# Altium PCB main.PcbDoc
Units mm, origin at the board's own origin, x right, y up, seen from the top; angles counter-clockwise.
Board outline 75 x 30.4 mm, 4 copper layers (Top Layer, Int1, Int2, Bottom Layer), stack 1.334 mm thick; 60 components, 60 nets, 280 pads, 1537 vias.
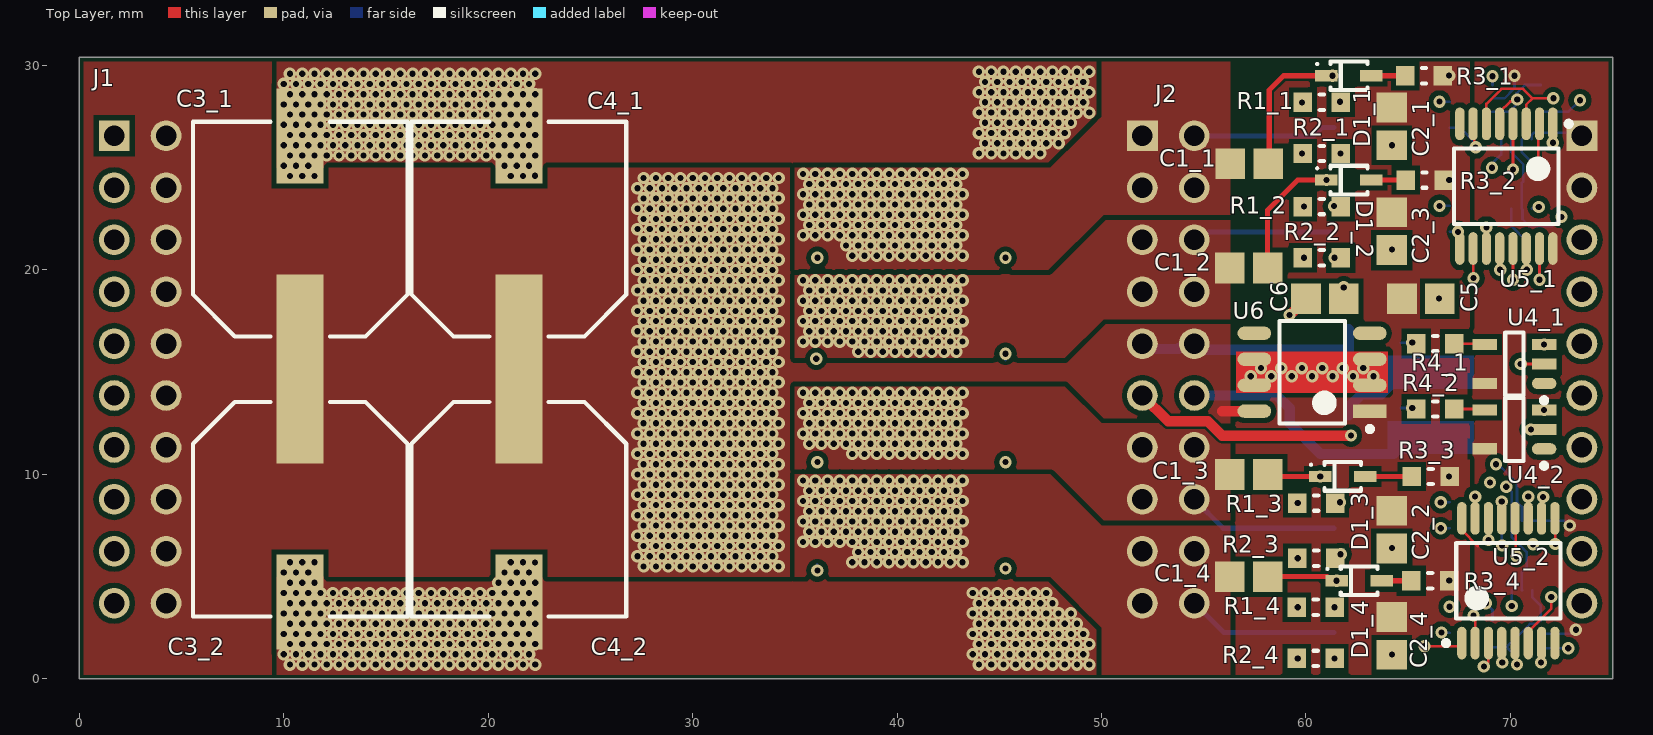
[diagram p0: Top Layer view]
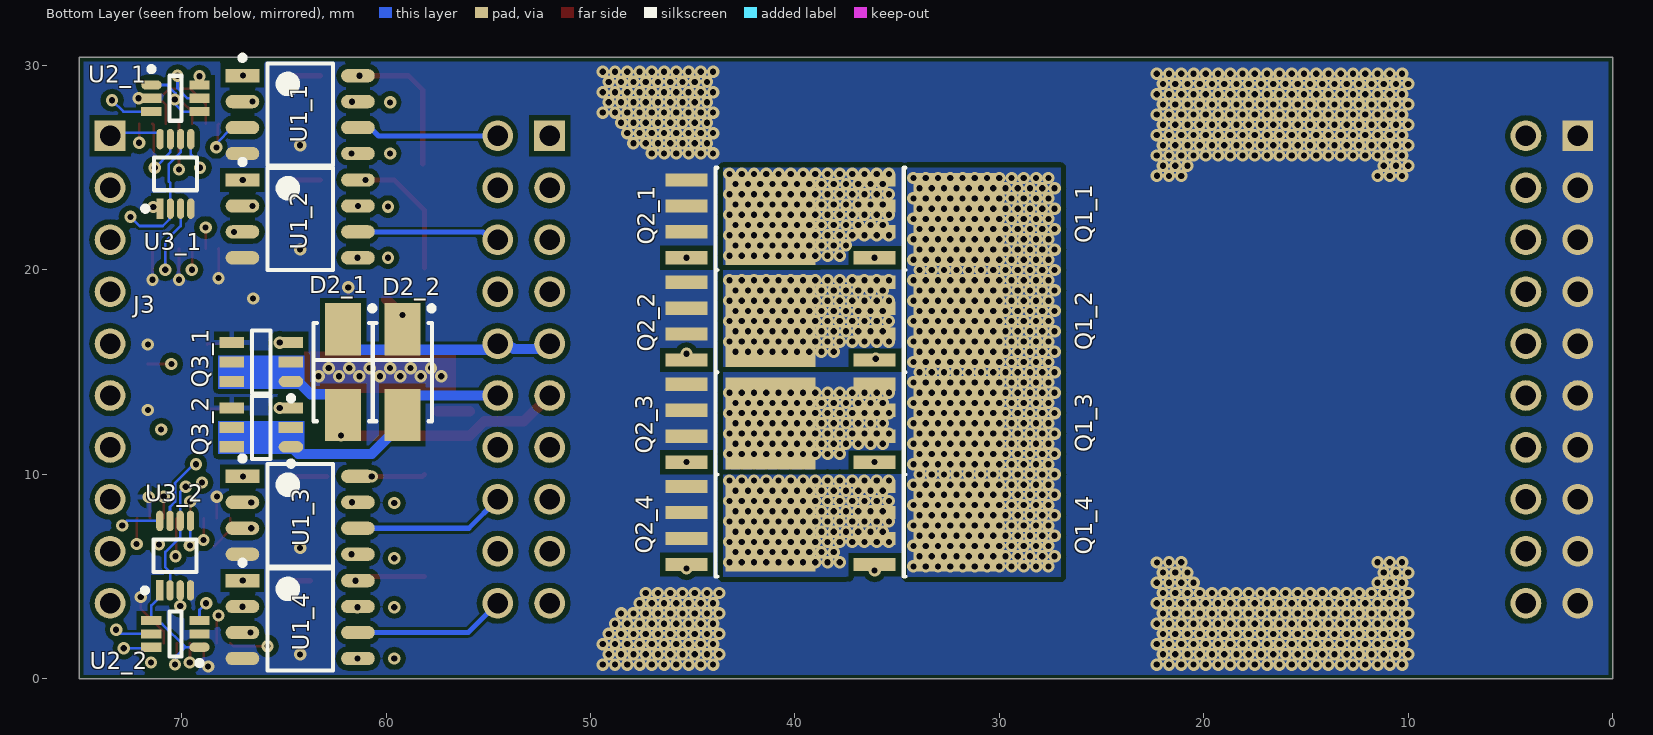
[diagram p1: Bottom Layer view, seen from below]
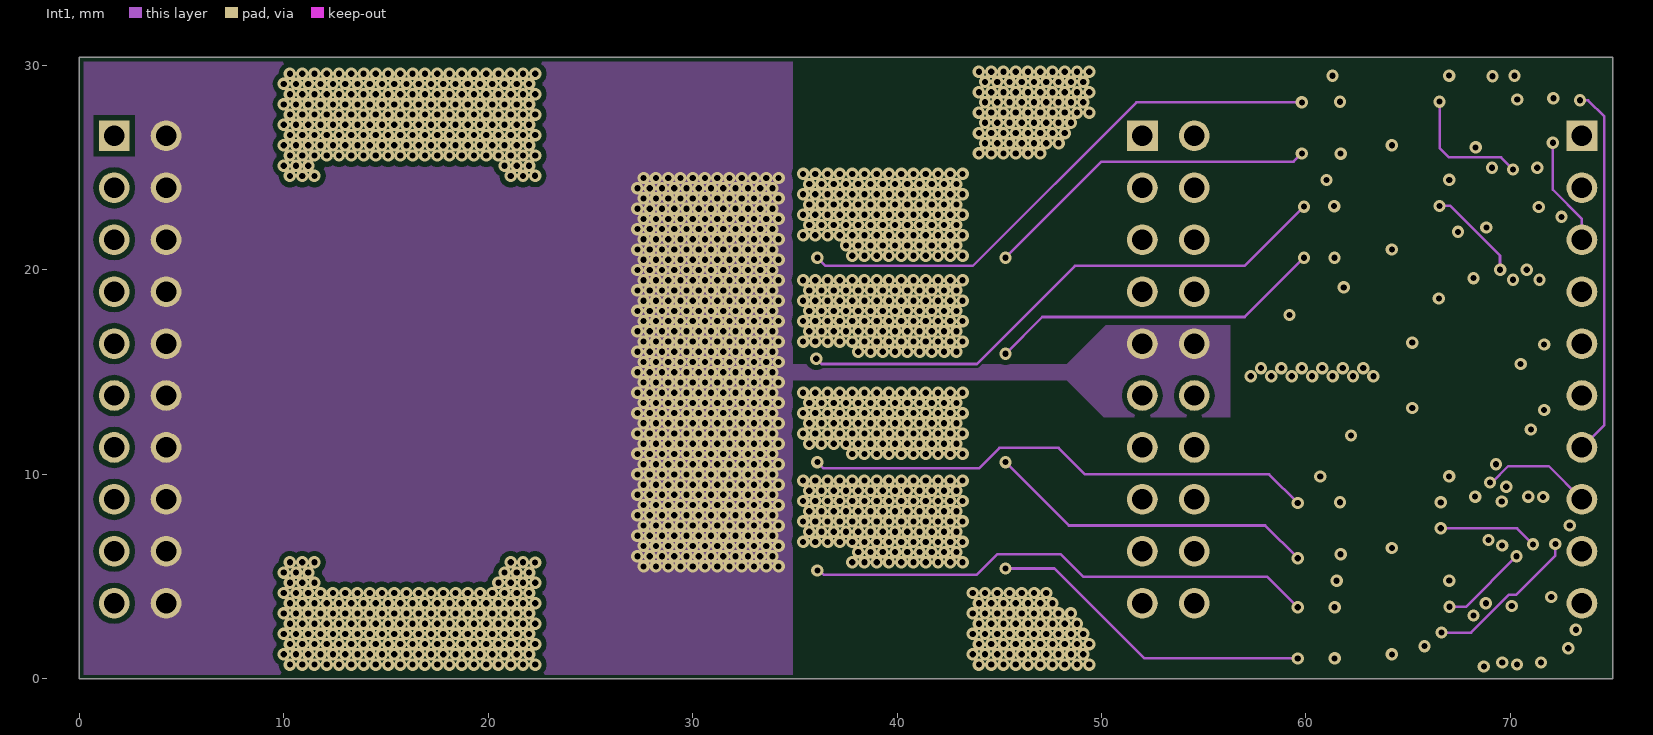
[diagram p2: Int1]
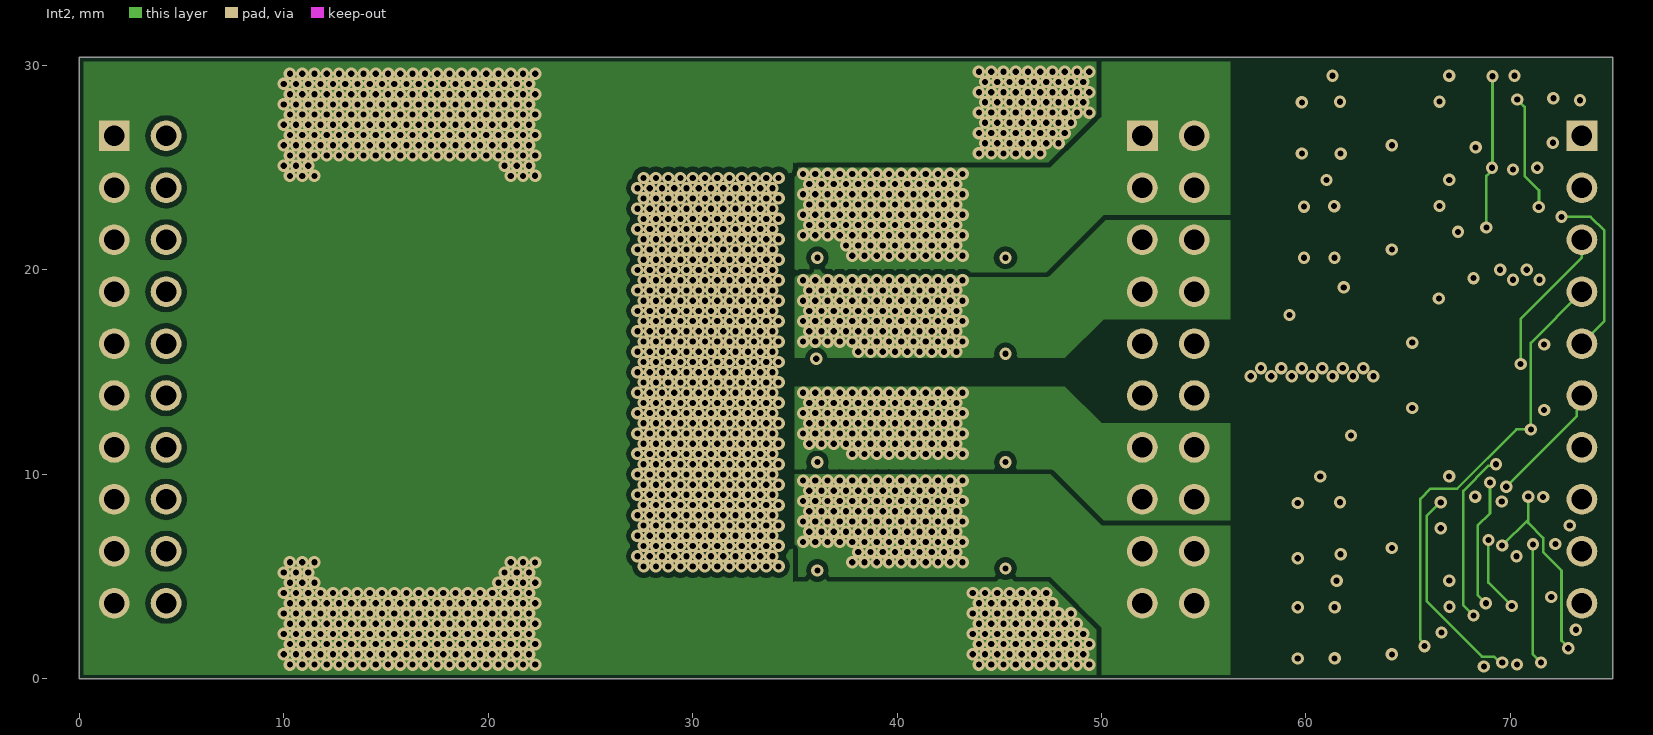
[diagram p3: Int2]
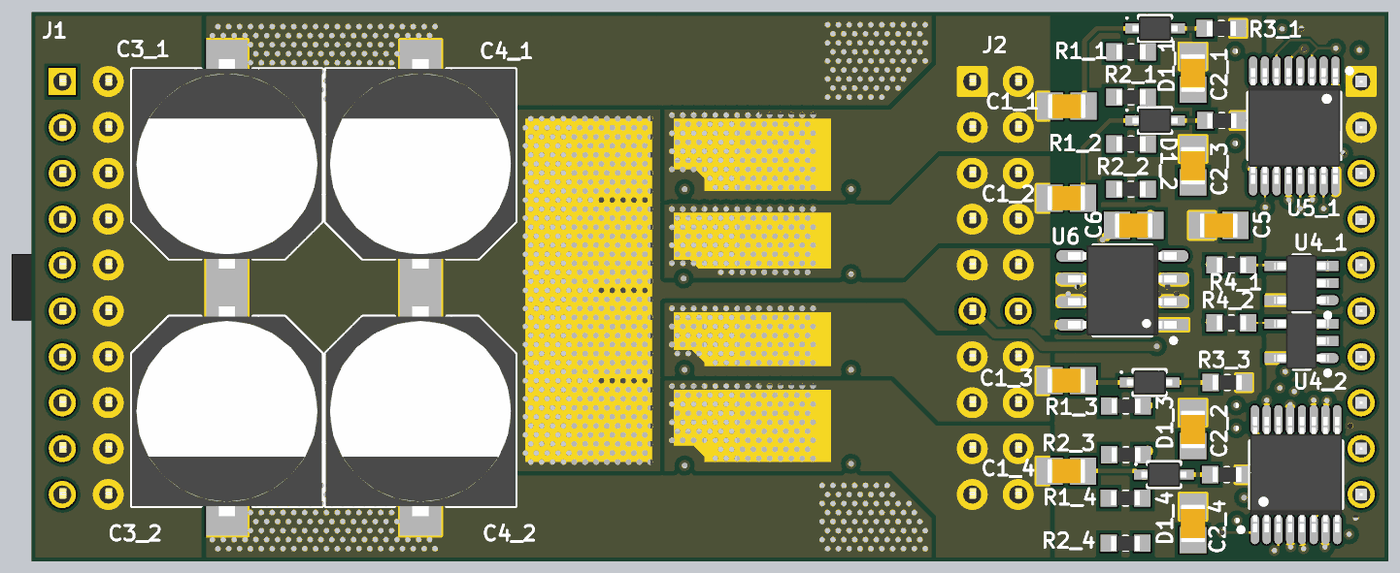
[diagram p4: 3D render of the assembled board from above, using the file's embedded part models]
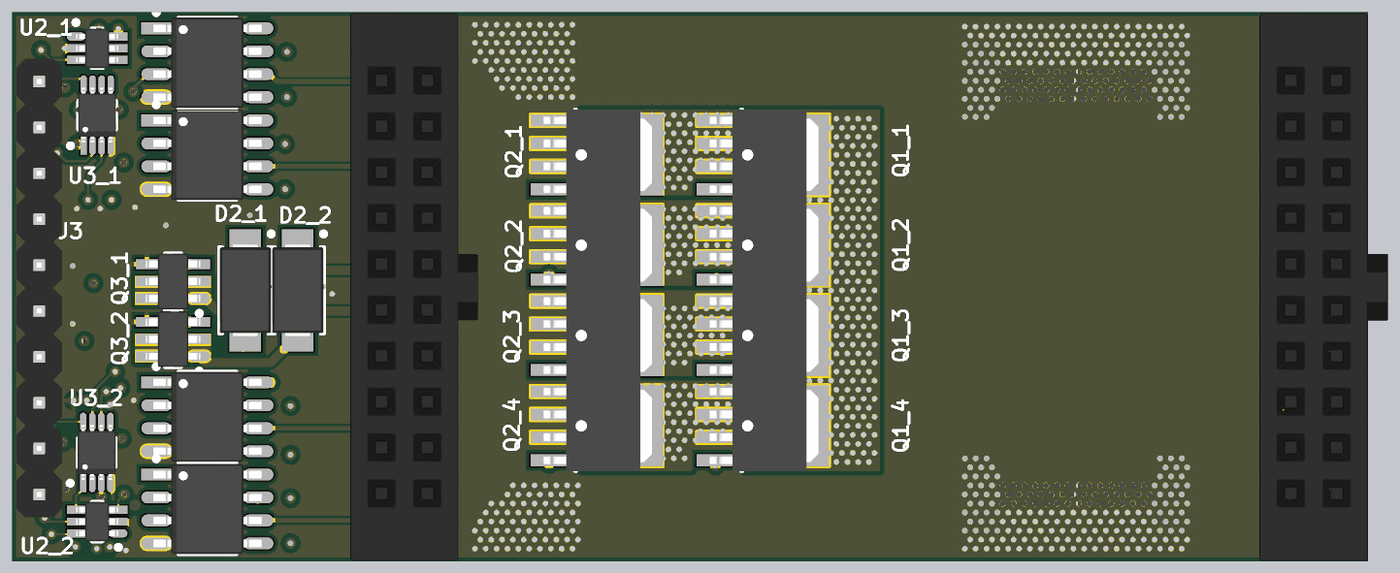
[diagram p5: 3D render of the assembled board from below, using the file's embedded part models]

## Layer stack, top to bottom
Top Solder: solder mask 0.0254, SM-001, Dk 4
Top Layer: signal copper 0.035
Dielectric 1: prepreg 0.1295, PP-017, Dk 4.3
Dielectric 2: prepreg 0.1295, PP-017, Dk 4.3
Int1: signal copper 0.0175
Dielectric 3: core 0.7112, Core-039, Dk 4.8
Int2: signal copper 0.0175
Dielectric 4: prepreg 0.1295, PP-017, Dk 4.3
Dielectric 5: prepreg 0.1295, PP-017, Dk 4.3
Bottom Layer: signal copper 0.035
Bottom Solder: solder mask 0.0254, SM-001, Dk 4

## Board outline
0,0 0,30.4 75,30.4 75,0

## Design rules (kind name [scope] priority, off if disabled: settings)
BoardOutlineClearance JLC_BoardOutlineClearance_Silk [OnLayer('Top Overlay')  or   OnLayer('Bottom Overlay')] p1: gap=0 ignorepadtopadclearanceinfootprint=FALSE
BoardOutlineClearance JLC_BoardOutlineClearance_Single [All] p2: gap=0.4 ignorepadtopadclearanceinfootprint=FALSE except(0: Arc-SplitContinuation Track-SplitContinuation SMDPad-SplitContinuation THPad-SplitContinuation Via-SplitContinuation Fill-SplitContinuation Poly-SplitContinuation Region-SplitContinuation Text-SplitContinuation; 0.2: Arc-OutlineEdge Track-OutlineEdge SMDPad-OutlineEdge THPad-OutlineEdge Via-OutlineEdge Fill-OutlineEdge Poly-OutlineEdge Region-OutlineEdge Text-OutlineEdge)
BoardOutlineClearance JLC_BoardOutlineClearance_Panel [All] p3: gap=0.4 ignorepadtopadclearanceinfootprint=FALSE except(0: Arc-SplitContinuation Track-SplitContinuation SMDPad-SplitContinuation THPad-SplitContinuation Via-SplitContinuation Fill-SplitContinuation Poly-SplitContinuation Region-SplitContinuation Text-SplitContinuation)
Clearance JLC_Clearance_SB [(HasFootprint('0603 Solder Bridge-Footprint-1'))] p1: gap=0.127 ignorepadtopadclearanceinfootprint=FALSE except(0: Fill-Hole Poly-Hole Region-Hole Text-Hole; 0.254: SMDPad-Fill SMDPad-Poly SMDPad-Region THPad-Fill THPad-Poly THPad-Region Via-Fill Via-Poly Via-Region)
Clearance JLC_Clearance_Top [All] p2: gap=0.127 ignorepadtopadclearanceinfootprint=FALSE except(0: Fill-Hole Poly-Hole Region-Hole Text-Hole; 0.254: SMDPad-Fill SMDPad-Poly SMDPad-Region THPad-Fill THPad-Poly THPad-Region Via-Fill Via-Poly Via-Region Fill-Fill Fill-Poly Fill-Region Poly-Poly Poly-Region Region-Region)
Clearance JLC_Clearance_SameNet [All] p3: gap=0 ignorepadtopadclearanceinfootprint=TRUE
ComponentClearance JLC_ComponentClearance [All] p1: gap=0 collisioncheckmode=3 verticalgap=0 showdistances=FALSE
ComponentOrientations JLC_ComponentOrientations [All] p1: allowedrotations=32
Height JLC_Height [All] p1: minheight=0 maxheight=2539.975 prefheight=12.7
HoleSize JLC_HoleSize [All] p1: absolutevalues=TRUE maxlimit=6.3 minlimit=0.3 maxpercent=80.000 minpercent=20.000
HoleToHoleClearance JLC_HoleToHoleClearance [All] p1: gap=0.54 allowstackedmicrovias=TRUE
MinimumAnnularRing JLC_MinimumAnnularRing [All] p1: minimumring=0.076
MinimumSolderMaskSliver JLC_MinimumSolderMaskSliver [All] p1: minsoldermaskwidth=0
PolygonConnect [All] p1: connectstyle=Relief reliefconductorwidth=0.254 reliefentries=4 polygonreliefangle="90 Angle" airgapwidth=0.254
RoutingVias JLC_RoutingVias [All] p1: holewidth=0.381 width=0.635 viastyle="Through Hole" minholewidth=0.305 minwidth=0.61 maxholewidth=6.299 maxwidth=12.7 useviatemplates=TRUE viatemplateguid#1={57812D51-82ED-402C-9FC4-13BC4F7481FD} viatemplatename#1=JLC_2lyr_min
SilkToSilkClearance JLC_SilkToSilkClearance [All] p1: silktosilkclearance=0
SilkToSolderMaskClearance JLC_SilkToSolderMaskClearance [IsPad] p1: minsilkscreentomaskgap=0 clearancetoexposedcopper=TRUE
SolderMaskExpansion [All] p1: expansion=0.102 istentingtop=FALSE
Width JLC_Width [All] p1: maxlimit=12.7 minlimit=0.127 preferedwidth=0.254
23 further rules are at their usual default settings.

## Classes and differential pairs
channel class motor: mot_L mot_R
channel class halfBridge: mot_L1_hb11 mot_L1_hb22 mot_R2_hb13 mot_R2_hb24
component class mot_R: C3_2 C4_2 D2_2 Q3_2 R4_2 U2_2 U3_2 U4_2 U5_2
component class mot_R2_hb24: C1_4 C2_4 D1_4 Q1_4 Q2_4 R1_4 R2_4 R3_4 U1_4
component class mot_R2_hb13: C1_3 C2_3 D1_3 Q1_3 Q2_3 R1_3 R2_3 R3_3 U1_3
component class mot_L: C3_1 C4_1 D2_1 Q3_1 R4_1 U2_1 U3_1 U4_1 U5_1
component class mot_L1_hb22: C1_2 C2_2 D1_2 Q1_2 Q2_2 R1_2 R2_2 R3_2 U1_2
component class mot_L1_hb11: C1_1 C2_1 D1_1 Q1_1 Q2_1 R1_1 R2_1 R3_1 U1_1
component class main: C5 C6 J1 J2 J3 U6

## Components (designator, comment, footprint, x,y, rotation, side; value= is the part's Value field where it differs from the comment)
C1_1 "35n4 25V" "CAP 0805 L" 57.225,25.2 r0 top (schematic designator C1)
C1_2 "35n4 25V" "CAP 0805 L" 57.2,20.1 r0 top (schematic designator C1)
C1_3 "35n4 25V" "CAP 0805 L" 57.2,10 r0 top (schematic designator C1)
C1_4 "35n4 25V" "CAP 0805 L" 57.2,5 r0 top (schematic designator C1)
C2_1 "1u 15V" "CAP 0805 L" 64.2,27.025 r90 top (schematic designator C2)
C2_2 "1u 15V" "CAP 0805 L" 64.2,7.3 r90 top (schematic designator C2)
C2_3 "1u 15V" "CAP 0805 L" 64.2,21.9 r90 top (schematic designator C2)
C2_4 "1u 15V" "CAP 0805 L" 64.2,2.1 r90 top (schematic designator C2)
C3_1 "330u 35V" "CAP ALUM 10X10" 10.8,22 r90 top (schematic designator C3)
C3_2 "330u 35V" "CAP ALUM 10X10" 10.8,8.3 r270 top (schematic designator C3)
C4_1 "330u 35V" "CAP ALUM 10X10" 21.5,22 r90 top (schematic designator C4)
C4_2 "330u 35V" "CAP ALUM 10X10" 21.5,8.3 r270 top (schematic designator C4)
C5 "10u" "CAP 0805 L" 65.625,18.6 r180 top
C6 "10u" "CAP 0805 L" 60.925,18.6 r180 top
D1_1 "100V 200mA" SODFL250X100-2M 62.1,29.5 r0 top (schematic designator D1)
D1_2 "100V 200mA" SODFL250X100-2M 62.1,24.4 r0 top (schematic designator D1)
D1_3 "100V 200mA" SODFL250X100-2M 61.8,9.9 r0 top (schematic designator D1)
D1_4 "100V 200mA" SODFL250X100-2M 62.6,4.8 r0 top (schematic designator D1)
D2_1 "1000V 1A" DIOM4426X30M 62.1,15 r270 bottom (schematic designator D2)
D2_2 "1000V 1A" DIOM4426X30M 59.2,15 r270 bottom (schematic designator D2)
J1 "2x10 F" "CONN HDR 2x10 F BOT" 1.7,26.56 r0 top
J2 "2x10 F" "CONN HDR 2x10 F BOT" 52,26.56 r0 top
J3 "1x10 M" "CONN HDR 1x10 M" 73.5,26.56 r180 bottom
Q1_1 "40V 100A 4m4R" "DPAK127P600X120-5M (LFPAK56; Power-SO8)" 33.45,22.5 r180 bottom (schematic designator Q1)
Q1_2 "40V 100A 4m4R" "DPAK127P600X120-5M (LFPAK56; Power-SO8)" 33.45,17.5 r180 bottom (schematic designator Q1)
Q1_3 "40V 100A 4m4R" "DPAK127P600X120-5M (LFPAK56; Power-SO8)" 33.45,12.5 r180 bottom (schematic designator Q1)
Q1_4 "40V 100A 4m4R" "DPAK127P600X120-5M (LFPAK56; Power-SO8)" 33.45,7.5 r180 bottom (schematic designator Q1)
Q2_1 "40V 100A 4m4R" "DPAK127P600X120-5M (LFPAK56; Power-SO8)" 42.65,22.5 r180 bottom (schematic designator Q2)
Q2_2 "40V 100A 4m4R" "DPAK127P600X120-5M (LFPAK56; Power-SO8)" 42.65,17.5 r180 bottom (schematic designator Q2)
Q2_3 "40V 100A 4m4R" "DPAK127P600X120-5M (LFPAK56; Power-SO8)" 42.65,12.5 r180 bottom (schematic designator Q2)
Q2_4 "40V 100A 4m4R" "DPAK127P600X120-5M (LFPAK56; Power-SO8)" 42.65,7.5 r180 bottom (schematic designator Q2)
Q3_1 "40V 6A2 23m" SOT457_FET 66.1,15.5 r0 bottom (schematic designator Q3)
Q3_2 "40V 6A2 23m" SOT457_FET 66.1,12.3 r0 bottom (schematic designator Q3)
R1_1 "3R96" "RES 0603 L" 60.775,28.2 r180 top (schematic designator R1)
R1_2 "3R96" "RES 0603 L" 60.775,23.1 r180 top (schematic designator R1)
R1_3 "3R96" "RES 0603 L" 60.5,8.6 r180 top (schematic designator R1)
R1_4 "3R96" "RES 0603 L" 60.475,3.5 r180 top (schematic designator R1)
R2_1 "3R96" "RES 0603 L" 60.775,25.7 r180 top (schematic designator R2)
R2_2 "3R96" "RES 0603 L" 60.775,20.6 r180 top (schematic designator R2)
R2_3 "3R96" "RES 0603 L" 60.5,5.9 r180 top (schematic designator R2)
R2_4 "3R96" "RES 0603 L" 60.475,1 r180 top (schematic designator R2)
R3_1 "1R" "RES 0603 L" 65.775,29.5 r180 top (schematic designator R3)
R3_2 "1R" "RES 0603 L" 65.8,24.4 r180 top (schematic designator R3)
R3_3 "1R" "RES 0603 L" 66.1,9.9 r180 top (schematic designator R3)
R3_4 "1R" "RES 0603 L" 66.075,4.8 r180 top (schematic designator R3)
R4_1 "100" "RES 0603 L" 66.325,16.4 r180 top (schematic designator R4)
R4_2 "100" "RES 0603 L" 66.325,13.2 r180 top (schematic designator R4)
U1_1 "IRS2007STRPBF" SOIC-8 64.2,27.6 r180 bottom (schematic designator U1)
U1_2 "IRS2007STRPBF" SOIC-8 64.2,22.5 r180 bottom (schematic designator U1)
U1_3 "IRS2007STRPBF" SOIC-8 64.2,8 r180 bottom (schematic designator U1)
U1_4 "IRS2007STRPBF" SOIC-8 64.2,2.9 r180 bottom (schematic designator U1)
U2_1 "74LVC2G14GW,125" SOT363 70.3,28.4 r180 bottom (schematic designator U2)
U2_2 "74LVC2G14GW,125" SOT363 70.3,2.2 r0 bottom (schematic designator U2)
U3_1 "SN74LVC2G08DCUR" VSSOP-8 70.3,24.7 r90 bottom (schematic designator U3)
U3_2 "SN74LVC2G08DCUR" VSSOP-8 70.318,6.026 r90 bottom (schematic designator U3)
U4_1 "74LVC1G17GW,125" SOT753 70.2,15.4 r180 top (schematic designator U4)
U4_2 "74LVC1G17GW,125" SOT753 70.2,12.2 r180 top (schematic designator U4)
U5_1 "74LVC2G14GW,125" TSSOP-16 69.8,24.1 r270 top (schematic designator U5)
U5_2 "74LVC2G14GW,125" TSSOP-16 69.9,4.8 r90 top (schematic designator U5)
U6 "REG 12V" SOIC-8 60.3,15 r180 top

## Footprints (in the part's own frame and the unit in brackets; to place one, negate y for a bottom-side part, rotate by r counter-clockwise, add the part's x,y. Pads: shape width x height; smd on the part's side, far side on the other; paste and mask are expansions set on the pad)
"CAP 0805 L" [mm] "Chip Capacitor, 2-Leads, Body 2.00x1.25mm, IPC Low Density"
  rect 1.45x1.5 smd: 1(-0.925,0) 2(0.925,0)
  body extent -1.05,-0.67 1.05,0.67, height 1.35
"CAP ALUM 10X10" [mm] "Aluminum Electrolytic Capacitor, Body 10.30x10.30x10.50mm, IPC Low Density"
  rect 4.65x2.3 smd: 1(-4.55,0) 2(4.55,0)
  silkscreen extent -5.25,-5.25 5.25,5.25, body extent -5.8,-5.25 5.8,5.25, height 10.5
"CONN HDR 1x10 M" [mm]
  rect 1.5x1.5 hole 1: 1(0,0)
  round 1.5 hole 1: 2(0,-2.54) 3(0,-5.08) 4(0,-7.62) 5(0,-10.16) 6(0,-12.7) 7(0,-15.24) 8(0,-17.78) 9(0,-20.32) 10(0,-22.86)
  body extent -1.27,-24.13 1.27,1.27, height 8.39
"CONN HDR 2x10 F BOT" [mm]
  rect 1.5x1.5 hole 1: 1(0,0)
  round 1.5 hole 1: 2(2.54,0) 3(0,-2.54) 4(2.54,-2.54) 5(0,-5.08) 6(2.54,-5.08) 7(0,-7.62) 8(2.54,-7.62) 9(0,-10.16) 10(2.54,-10.16) 11(0,-12.7) 12(2.54,-12.7) 13(0,-15.24) 14(2.54,-15.24) 15(0,-17.78) 16(2.54,-17.78) 17(0,-20.32) 18(2.54,-20.32) 19(0,-22.86) 20(2.54,-22.86)
  body extent -2.8,-26.53 4.3,3.79, height 2.8
DIOM4426X30M [mm] "Molded Diode, 2-Leads, Body 4.37x2.62mm, IPC Low Density"
  rect 2.55x1.75 smd: 1(2.1,0) 2(-2.1,0)
  silkscreen extent -3.25,-1.45 2.4,1.55, body extent -2.6,-1.42 2.6,1.42, height 2.95
"DPAK127P600X120-5M (LFPAK56; Power-SO8)" [mm] "TO, 5-Pads, Body 5.15x5.86mm (max), IPC Low Density"
  rect 2.05x0.65 smd: 1(-2.65,-1.905) 2(-2.65,-0.635) 2(-2.65,0.635) 2(-2.65,1.905)
  rect 4.4x4.5 smd: 3(1.45,0)
  silkscreen extent -1.23,-2.5 -1.15,2.5, body extent -2.95,-2.5 3.05,2.5, height 1.35
"RES 0603 L" [mm] "Chip Resistor, 2-Leads, Body 1.60x0.80mm, IPC Low Density"
  rect 0.9x0.95 smd: 1(-0.925,0) 2(0.925,0)
  silkscreen extent -0.1,-0.38 0.1,0.38, body extent -0.8,-0.4 0.8,0.4, height 0.45
SODFL250X100-2M [mm] "SODFL, 2-Leads, Body 1.25x2.50mm, IPC Low Density"
  rect 1.1x0.55 smd: 1(1.1,0) 2(-1.1,0)
  silkscreen extent -1.6,-0.7 0.9,0.7, body extent -1.25,-0.67 1.25,0.67, height 1
SOIC-8 [mm] "SOIC, 8-Leads, Body 4.90x3.90mm, Pitch 1.27mm, IPC Low Density"
  rect 1.65x0.65 smd: 1(-2.825,1.905)
  oval 1.65x0.65 smd: 2(-2.825,0.635) 3(-2.825,-0.635) 4(-2.825,-1.905) 5(2.825,-1.905) 6(2.825,-0.635) 7(2.825,0.635) 8(2.825,1.905)
  silkscreen extent -2.95,-2.5 1.6,2.9, body extent -3,-2.5 3,2.5, height 1.7
SOT363 [mm] "SOT23, 6-Leads, Body 2.00x2.10mm, Pitch 0.65mm, IPC Low Density"
  oval 1x0.45 smd: 1(-1.175,0.65)
  rect 1x0.45 smd: 2(-1.175,0) 3(-1.175,-0.65) 4(1.175,-0.65) 5(1.175,0) 6(1.175,0.65)
  silkscreen extent -1.3,-1.1 0.3,1.55, body extent -1.15,-1.1 1.15,1.1, height 1.1
SOT457_FET [mm] "SOT23, 6-Leads, Body 2.90x2.75mm, Pitch 0.95mm, IPC Low Density"
  rect 1.2x0.55 smd: 1(-1.45,-0.95) 2(1.45,-0.95) 3(-1.45,0) 3(1.45,0) 3(1.45,0.95)
  oval 1.2x0.55 smd: 3(-1.45,0.95)
  silkscreen extent -1.57,-1.55 0.45,1.9, body extent -1.5,-1.55 1.5,1.55, height 1.1
SOT753 [mm] "SOT23, 5-Leads, Body 2.90x2.75mm, Pitch 0.95mm, IPC Low Density"
  oval 1.2x0.55 smd: 1(-1.45,0.95)
  rect 1.2x0.55 smd: 2(-1.45,0) 3(-1.45,-0.95) 4(1.45,-0.95) 5(1.45,0.95)
  silkscreen extent -1.58,-1.55 0.45,1.9, body extent -1.5,-1.55 1.5,1.55, height 1.1
TSSOP-16 [mm] "TSOP, 16-Leads, Body 5.00x4.40mm, Pitch 0.65mm, IPC Low Density"
  oval 1.6x0.45 smd: 1(-3.05,2.275) 2(-3.05,1.625) 3(-3.05,0.975) 4(-3.05,0.325) 5(-3.05,-0.325) 6(-3.05,-0.975) 7(-3.05,-1.625) 8(-3.05,-2.275) 9(3.05,-2.275) 10(3.05,-1.625) 11(3.05,-0.975) 12(3.05,-0.325) 13(3.05,0.325) 14(3.05,0.975) 15(3.05,1.625) 16(3.05,2.275)
  silkscreen extent -3.17,-2.55 1.85,3.17, body extent -3.2,-2.55 3.2,2.55, height 1.1
VSSOP-8 [mm] "TSSOP, 8-Leads, Body 2.00x2.30mm, Pitch 0.50mm, IPC Low Density"
  rect 1x0.35 smd: 1(-1.7,0.75)
  oval 1x0.35 smd: 2(-1.7,0.25) 3(-1.7,-0.25) 4(-1.7,-0.75) 5(1.7,-0.75) 6(1.7,-0.25) 7(1.7,0.25) 8(1.7,0.75)
  silkscreen extent -1.82,-1.05 0.8,1.6, body extent -1.55,-1.05 1.55,1.05, height 0.9

## Part data
C1_1 C1_2 C1_3 C1_4 C2_1 C2_2 C2_3 C2_4 C5 C6: library part "CAP 0805", "CAP 0805"
C3_1 C3_2 C4_1 C4_2: library part "CAP 330uF 35V", "PANASONIC ELECTRONIC COMPONENTS         EEE1VA331P             SMD Aluminium Electrolytic Capacitor, Radial Can - SMD, 330 F, 35 V, S Series", Capacitance=330uF, Case/Package=Radial, Leakage Current=3uA, Manufacturer 1=Panasonic, Manufacturer Part Number 1=EEE-1VA331P, Max Operating Temperature=85°C, Min Operating Temperature=-40°C, Package Quantity=500, Ripple Current=350mA, Supplier Part Number 1=PCE3959CT-ND, Tolerance=20%, Voltage=35V, Category="Aluminum Electrolytic Capacitors", ComponentLink1Description=https://datasheet.ciiva.com/16389/aba0000ce2-16389541.pdf?src-supplier=Future+Electronics, ComponentLink1URL=https://datasheet.ciiva.com/16389/aba0000ce2-16389541.pdf?src-supplier=Future+Electronics, ComponentLink2Description=https://datasheet.ciiva.com/30235/11aba0000ce2-30235093.pdf?src-supplier=Onlinecomponents.com, ComponentLink2URL=https://datasheet.ciiva.com/30235/11aba0000ce2-30235093.pdf?src-supplier=Onlinecomponents.com, ComponentLink3Description=https://datasheet.ciiva.com/46374/aba0000ce2-46374421.pdf?src-supplier=Element14, ComponentLink3URL=https://datasheet.ciiva.com/46374/aba0000ce2-46374421.pdf?src-supplier=Element14, ComponentLink4Description=https://datasheet.ciiva.com/43470/aba0000ce2-43470694.pdf?src-supplier=Farnell, ComponentLink4URL=https://datasheet.ciiva.com/43470/aba0000ce2-43470694.pdf?src-supplier=Farnell, ComponentLink5Description=https://datasheet.ciiva.com/14593/70255710-14593929.pdf?src-supplier=Allied+Electronics, ComponentLink5URL=https://datasheet.ciiva.com/14593/70255710-14593929.pdf?src-supplier=Allied+Electronics, ComponentLink6Description=https://datasheet.ciiva.com/24025/aba0000ce2-40801-24025561.pdf?src-supplier=Mouser, ComponentLink6URL=https://datasheet.ciiva.com/24025/aba0000ce2-40801-24025561.pdf?src-supplier=Mouser, ComponentLink7Description=https://datasheet.ciiva.com/14599/70255710-14599770.pdf?src-supplier=Allied+Electronics, ComponentLink7URL=https://datasheet.ciiva.com/14599/70255710-14599770.pdf?src-supplier=Allied+Electronics, ComponentLink8Description=https://datasheet.ciiva.com/17534/aba0000ce2-17534540.pdf?src-supplier=Avnet+Europe, ComponentLink8URL=https://datasheet.ciiva.com/17534/aba0000ce2-17534540.pdf?src-supplier=Avnet+Europe, ComponentLink9Description=https://datasheet.ciiva.com/31414/aba0000ce2-31414702.pdf?src-supplier=Farnell, ComponentLink9URL=https://datasheet.ciiva.com/31414/aba0000ce2-31414702.pdf?src-supplier=Farnell, Contact Plating=Tin, Diameter=10mm, Height=10.2mm, Height - Seated (Max)=0.402inch, Lead Free="Lead Free", Length=10.5mm, Life (Hours)=2000Hour, Mount="Surface Mount,PCB", Packaging="Tape and Reel", Polarity=Polar, Pricing 1="1=0.73000, 10=0.51400, 50=0.38880, 100=0.33860 (USD)", Radiation Hardening=No, REACH SVHC="No SVHC", Ripple Current (AC)=350mA, RoHS=Yes, Stock 1=45237, Supplier 1=Digi-Key, Termination=SMD/SMT, Voltage Rating=35V, Voltage Rating (DC)=35V
D1_1 D1_2 D1_3 D1_4: library part "DIODE 100V 200mA", "BAS16GWJ"
D2_1 D2_2: library part "DIODE 1000V 1A", "S1MTR"
J1 J2: library part "CONN Header 2x10 F", "SFH11-PBPC-D10-ST-BK", Supplier Part Number 1=S9197-ND, Supplier 1=Digi-Key
J3: library part "CONN header 1x10 M", "CONN header 1x10 M"
Q1_1 Q1_2 Q1_3 Q1_4 Q2_1 Q2_2 Q2_3 Q2_4: library part "FET 40V 100A 4m4R", "BUK7Y4R4-40EX"
Q3_1 Q3_2: library part "FET 40V 6A2 23mR", "PMN20ENAX"
R1_1 R1_2 R1_3 R1_4 R2_1 R2_2 R2_3 R2_4 R3_1 R3_2 R3_3 R3_4: library part "RES 0603", "0603 RES"
R4_1 R4_2: library part "RES 0603", "RES 0603"
U1_1 U1_2 U1_3 U1_4: library part "IC Half Bridge Driver"
U2_1 U2_2: library part "IC NOT 2CH"
U3_1 U3_2: library part "IC AND2 2CH"
U4_1 U4_2: library part "IC BUF 1CH"
U5_1 U5_2: library part "IC MUX 4CH 2:1", "74LVC157APW", Supplier Part Number 1=1727-4028-1-ND, Supplier 1=Digi-Key
U6: library part "IC REG 12V LINEAR", "L78L12ABD-TR", Supplier Part Number 1=497-7767-1-ND, Supplier 1=Digi-Key

## Via types
v1: diameter 0.61, hole 0.305, Top Layer to Bottom Layer, tented both sides, 1454 vias
v2: diameter 0.6, hole 0.3, Top Layer to Bottom Layer, tented both sides, 83 vias

## Nets (pads, with @x,y where several pads share a name; then routed paths per layer and width w, separated by ;. In a path a pad name is that pad's centre, name@x,y a point inside that pad or via, vN(x,y) a via of type N, cw(c..) or ccw(c..) an arc to the next point about the centre after c; other vN are vias at no path point)
3V3: J3.1 J3.2 U2_1.5 U2_2.5 U3_1.8 U3_2.8 U4_1.5 U4_2.5 U5_1.16 U5_2.16 | length 10.1
  Top Layer w0.127: U5_2.16 67.625,7.275 68.4,6.5
  Bottom Layer w0.127: U2_1.5 69.7,28.4 70.2,28.9 v2(70.2,29.5) ; U3_1.8 71.05,26.612 71.153,26.716 73.344,26.716 J3.1 ; U3_2.8 72.674,7.726 v2(72.9,7.5) ; U2_2.5 73,2.2 v2(73.2,2.4)
12V: C2_1.2 C2_2.2 C2_3.2 C2_4.2 C5.2 R3_1.1 R3_2.1 R3_3.1 R3_4.1 U1_1.1 U1_2.1 U1_3.1 U1_4.1 U6.1 | length 0.1
  Bottom Layer w0.127: v1(67.005,4.805) U1_4.1 ; v2(67.005,9.905) U1_3.1 ; v1(67.005,24.405) U1_2.1 ; v2(67.005,29.505) U1_1.1
24V: C3_1.1 C3_2.1 C4_1.1 C4_2.1 C6.2 D2_1.2 D2_2.2 J1.2 J1.4 J1.6 J1.8 J1.10 J1.12 J1.14 J1.16 J1.18 J1.20 J2.9 J2.10 Q1_1.3 Q1_2.3 Q1_3.3 Q1_4.3 U6.8 | length 14
  Top Layer w0.508: 55.905,13.095 U6.8 ; v2(59.2,17.8) 59.218,17.818 59.243,17.818 60,18.575 C6.2
  Bottom Layer w0.508: J2.9 52.268,16.4 52.531,16.138 53.746,16.138 53.819,16.21 54.35,16.21 J2.10 ; J2.10@54.54,16.1 62.1,16.1 D2_1.2
  other v1: 27.6,5.5 28.2,5.5 28.8,5.5 29.4,5.5 30,5.5 30.6,5.5 31.2,5.5 31.8,5.5 32.4,5.5 33,5.5 33.6,5.5 34.2,5.5 27.3,6 27.9,6 28.5,6 29.1,6 29.7,6 30.3,6 30.9,6 31.5,6 32.1,6 32.7,6 33.3,6 33.9,6 27.6,6.5 28.2,6.5 28.8,6.5 29.4,6.5 30,6.5 30.6,6.5 31.2,6.5 31.8,6.5 32.4,6.5 33,6.5 33.6,6.5 34.2,6.5 27.3,7 27.9,7 28.5,7 29.1,7 29.7,7 30.3,7 30.9,7 31.5,7 32.1,7 32.7,7 33.3,7 33.9,7 27.6,7.5 28.2,7.5 28.8,7.5 29.4,7.5 30,7.5 30.6,7.5 31.2,7.5 31.8,7.5 32.4,7.5 33,7.5 33.6,7.5 34.2,7.5 27.3,8 27.9,8 28.5,8 29.1,8 29.7,8 30.3,8 30.9,8 31.5,8 32.1,8 32.7,8 33.3,8 33.9,8 27.6,8.5 28.2,8.5 28.8,8.5 29.4,8.5 30,8.5 30.6,8.5 31.2,8.5 31.8,8.5 32.4,8.5 33,8.5 33.6,8.5 34.2,8.5 27.3,9 27.9,9 28.5,9 29.1,9 29.7,9 30.3,9 30.9,9 31.5,9 32.1,9 32.7,9 33.3,9 33.9,9 27.6,9.5 28.2,9.5 28.8,9.5 29.4,9.5 30,9.5 30.6,9.5 31.2,9.5 31.8,9.5 32.4,9.5 33,9.5 33.6,9.5 34.2,9.5 27.3,10 27.9,10 28.5,10 29.1,10 29.7,10 30.3,10 30.9,10 31.5,10 32.1,10 32.7,10 33.3,10 33.9,10 27.6,10.5 28.2,10.5 28.8,10.5 29.4,10.5 30,10.5 30.6,10.5 31.2,10.5 31.8,10.5 32.4,10.5 33,10.5 33.6,10.5 34.2,10.5 27.3,11 27.9,11 28.5,11 29.1,11 29.7,11 30.3,11 30.9,11 31.5,11 32.1,11 32.7,11 33.3,11 33.9,11 27.6,11.5 28.2,11.5 28.8,11.5 29.4,11.5 30,11.5 30.6,11.5 31.2,11.5 31.8,11.5 32.4,11.5 33,11.5 33.6,11.5 34.2,11.5 27.3,12 27.9,12 28.5,12 29.1,12 29.7,12 30.3,12 30.9,12 31.5,12 32.1,12 32.7,12 33.3,12 33.9,12 27.6,12.5 28.2,12.5 28.8,12.5 29.4,12.5 30,12.5 30.6,12.5 31.2,12.5 31.8,12.5 32.4,12.5 33,12.5 33.6,12.5 34.2,12.5 27.3,13 27.9,13 28.5,13 29.1,13 29.7,13 30.3,13 30.9,13 31.5,13 32.1,13 32.7,13 33.3,13 33.9,13 27.6,13.5 28.2,13.5 28.8,13.5 29.4,13.5 30,13.5 30.6,13.5 31.2,13.5 31.8,13.5 32.4,13.5 33,13.5 33.6,13.5 34.2,13.5 27.3,14 27.9,14 28.5,14 29.1,14 29.7,14 30.3,14 30.9,14 31.5,14 32.1,14 32.7,14 33.3,14 33.9,14 27.6,14.5 28.2,14.5 28.8,14.5 29.4,14.5 30,14.5 30.6,14.5 31.2,14.5 31.8,14.5 32.4,14.5 33,14.5 33.6,14.5 34.2,14.5 27.3,15 27.9,15 28.5,15 29.1,15 29.7,15 30.3,15 30.9,15 31.5,15 32.1,15 32.7,15 33.3,15 33.9,15 27.6,15.5 28.2,15.5 28.8,15.5 29.4,15.5 30,15.5 30.6,15.5 31.2,15.5 31.8,15.5 32.4,15.5 33,15.5 33.6,15.5 34.2,15.5 27.3,16 27.9,16 28.5,16 29.1,16 29.7,16 30.3,16 30.9,16 31.5,16 32.1,16 32.7,16 33.3,16 33.9,16 27.6,16.5 28.2,16.5 28.8,16.5 29.4,16.5 30,16.5 30.6,16.5 31.2,16.5 31.8,16.5 32.4,16.5 33,16.5 33.6,16.5 34.2,16.5 27.3,17 27.9,17 28.5,17 29.1,17 29.7,17 30.3,17 30.9,17 31.5,17 32.1,17 32.7,17 33.3,17 33.9,17 27.6,17.5 28.2,17.5 28.8,17.5 29.4,17.5 30,17.5 30.6,17.5 31.2,17.5 31.8,17.5 32.4,17.5 33,17.5 33.6,17.5 34.2,17.5 27.3,18 27.9,18 28.5,18 29.1,18 29.7,18 30.3,18 30.9,18 31.5,18 32.1,18 32.7,18 33.3,18 33.9,18 27.6,18.5 28.2,18.5 28.8,18.5 29.4,18.5 30,18.5 30.6,18.5 31.2,18.5 31.8,18.5 32.4,18.5 33,18.5 33.6,18.5 34.2,18.5 27.3,19 27.9,19 28.5,19 29.1,19 29.7,19 30.3,19 30.9,19 31.5,19 32.1,19 32.7,19 33.3,19 33.9,19 27.6,19.5 28.2,19.5 28.8,19.5 29.4,19.5 30,19.5 30.6,19.5 31.2,19.5 31.8,19.5 32.4,19.5 33,19.5 33.6,19.5 34.2,19.5 27.3,20 27.9,20 28.5,20 29.1,20 29.7,20 30.3,20 30.9,20 31.5,20 32.1,20 32.7,20 33.3,20 33.9,20 27.6,20.5 28.2,20.5 28.8,20.5 29.4,20.5 30,20.5 30.6,20.5 31.2,20.5 31.8,20.5 32.4,20.5 33,20.5 33.6,20.5 34.2,20.5 27.3,21 27.9,21 28.5,21 29.1,21 29.7,21 30.3,21 30.9,21 31.5,21 32.1,21 32.7,21 33.3,21 33.9,21 27.6,21.5 28.2,21.5 28.8,21.5 29.4,21.5 30,21.5 30.6,21.5 31.2,21.5 31.8,21.5 32.4,21.5 33,21.5 33.6,21.5 34.2,21.5 27.3,22 27.9,22 28.5,22 29.1,22 29.7,22 30.3,22 30.9,22 31.5,22 32.1,22 32.7,22 33.3,22 33.9,22 27.6,22.5 28.2,22.5 28.8,22.5 29.4,22.5 30,22.5 30.6,22.5 31.2,22.5 31.8,22.5 32.4,22.5 33,22.5 33.6,22.5 34.2,22.5 27.3,23 27.9,23 28.5,23 29.1,23 29.7,23 30.3,23 30.9,23 31.5,23 32.1,23 32.7,23 33.3,23 33.9,23 27.6,23.5 28.2,23.5 28.8,23.5 29.4,23.5 30,23.5 30.6,23.5 31.2,23.5 31.8,23.5 32.4,23.5 33,23.5 33.6,23.5 34.2,23.5 27.3,24 27.9,24 28.5,24 29.1,24 29.7,24 30.3,24 30.9,24 31.5,24 32.1,24 32.7,24 33.3,24 33.9,24 27.6,24.5 28.2,24.5 28.8,24.5 29.4,24.5 30,24.5 30.6,24.5 31.2,24.5 31.8,24.5 32.4,24.5 33,24.5 33.6,24.5 34.2,24.5
BRK_B_L: D2_1.1 J2.11 Q3_1.3 | length 14.5
  Top Layer w0.508: J2.11 53.26,12.6 55.2,12.6 55.9,11.9 v2(62.2,11.9)
  Bottom Layer w0.508: D2_1.1 62.1,13.3 62.721,13.921 63.685,13.921 64.314,14.55 Q3_1.3@64.65,14.55
BRK_B_R: D2_2.1 J2.12 Q3_2.3 | length 11.9
  Bottom Layer w0.508: J2.12 58.579,13.86 59.2,13.239 D2_2.1 59.2,12.5 60.7,11 64.3,11 Q3_2.3@64.65,11.35
BRK_L: J3.3 U4_1.2 U5_1.1 | length 14.7
  Top Layer w0.127: v2(70.5,15.4) U4_1.2 ; v2(72.075,26.225) U5_1.1
  Int1 w0.127: v2(72.075,26.225) 72.075,23.925 73.5,22.5 J3.3
  Int2 w0.127: v2(70.5,15.4) 70.5,17.6 73.5,20.6 J3.3
BRK_R: J3.4 U4_2.2 U5_2.1 | length 23.8
  Top Layer w0.127: v2(65.8,1.6) 67.476,1.6 U5_2.1
  Int2 w0.127: v2(65.8,1.6) 65.8,1.711 65.6,1.911 65.6,8.8 66.1,9.3 67.4,9.3 70.3,12.2 v2(71,12.2) 71,16.44 J3.4
D\I\R\_1: U2_1.1 U2_1.4 U3_1.1 U5_1.5 | length 10.6
  Top Layer w0.127: U5_1.5 69.475,27.725 70.002,28.252 70.245,28.252 v2(70.336,28.342) v2@70.336,28.2
  Int2 w0.127: v2(70.336,28.342) 70.7,27.978 70.7,24.6 71.4,23.9 71.4,23.098 v2(71.385,23.082)
  Bottom Layer w0.127: U2_1.4 69.95,27.75 v2@70.3,28.1 ; v2@70.3,28.638 70.712,29.05 U2_1.1 ; U3_1.1 71.132,23.082 v2(71.385,23.082)
D\I\R\_2: U2_2.1 U2_2.4 U3_2.1 U5_2.5 | length 6.8
  Top Layer w0.127: U5_2.5 70.24,1.735 70.24,0.774 70.315,0.7 70.317,0.7 v2(70.32,0.697) v2@70.32,0.62
  Bottom Layer w0.127: U2_2.1 69.816,1.55 ; v2(70.32,0.697) 70.266,0.751 70.266,1.1 69.816,1.55 ; U3_2.1 71.068,4.001 71.475,3.594 U2_2.4 71.313,2.688 70.954,2.688 69.816,1.55
DIR_1: U2_1.6 U3_1.5 U5_1.11 | length 10.6
  Top Layer w0.127: U5_1.11 v2(68.825,22.075)
  Int2 w0.127: v2(68.825,22.075) 68.825,24.597 69.1,24.872 v2(69.1,25) 69.125,25.025 v2(69.125,29.475)
  Bottom Layer w0.127: v2(69.1,25) 69.1,25.2 69.55,25.65 U3_1.5 ; U2_1.6 v2(69.125,29.475)
DIR_2: U2_2.6 U3_2.5 U5_2.11 | length 13.7
  Top Layer w0.127: U5_2.11 v2(70.875,8.913)
  Int2 w0.127: v2(69.598,6.52) 70.875,7.797 ; v2(70.875,8.913) 70.875,7.797 ; v2(72.827,1.5) 72.827,1.54 72.5,1.867 72.5,5.3 71.6,6.2 71.6,6.9 70.875,7.625 70.875,7.797
  Bottom Layer w0.127: U3_2.5 69.583,7.711 69.583,6.535 v2(69.598,6.52) ; U2_2.6 71.525,1.5 v2(72.827,1.5)
DIR_L: J3.7 U2_1.3 | length 20.3
  Int1 w0.127: v2(73.4,28.3) 73.8,28.3 74.6,27.5 74.6,12.42 J3.7
  Bottom Layer w0.127: U2_1.3 72.85,27.75 v2(73.4,28.3)
DIR_R: J3.8 U2_2.3 | length 12.8
  Int1 w0.127: v2(69,9.6) 69.094,9.6 69.894,10.4 71.88,10.4 J3.8
  Int2 w0.127: v2(68.8,3.7) 68.4,4.1 68.4,7.5 69,8.1 v2(69,9.6)
  Bottom Layer w0.127: v2(68.8,3.7) 69.125,3.375 U2_2.3
GND: C2_1.1 C2_2.1 C2_3.1 C2_4.1 C3_1.2 C3_2.2 C4_1.2 C4_2.2 C5.1 C6.1 J1.1 J1.3 J1.5 J1.7 J1.9 J1.11 J1.13 J1.15 J1.17 J1.19 Q2_1.2 Q2_2.2 Q2_3.2 Q2_4.2 Q3_1.2 Q3_2.2 U1_1.4 U1_2.4 U1_3.4 U1_4.4 U2_1.2 U2_2.2 U3_1.4 U3_2.4 U4_1.3 U4_2.3 U5_1.3 U5_1.6 U5_1.10 U5_1.13 U5_1.15 U5_2.3 U5_2.6 U5_2.10 U5_2.13 U5_2.15 U6.2 U6.3 U6.6 U6.7 | length 18.2
  Top Layer w0.127: C6.1 v2(61.85,19.15) ; C2_4.1 v2(64.2,1.2) ; C2_2.1 v2(64.2,6.4) ; C2_3.1 v2(64.2,21) ; v2(66.5,18.6) C5.1 ; U5_1.10 68.2,21.025 68.187,21.012 68.187,19.613 v2(68.2,19.6) ; U5_2.15 v2(68.275,8.913) ; v2(68.7,0.6) 68.925,0.825 U5_2.3 ; U5_1.6 68.825,28.125 69.564,28.864 70.623,28.864 71.087,28.4 ; U5_2.13 v2(69.575,8.675) ; v2(70.125,19.525) U5_1.13 ; U5_1.3 70.775,28.088 71.087,28.4 ; U5_2.6 70.875,2.325 72,3.45 v2(72,4) ; v2(71.425,19.525) U5_1.15 ; U5_2.10 71.563,7.888 71.563,8.857 v2(71.602,8.896) ; v2(72.1,28.4) 71.087,28.4
  other v1: 10.3,0.7 10.9,0.7 11.5,0.7 12.1,0.7 12.7,0.7 13.3,0.7 13.9,0.7 14.5,0.7 15.1,0.7 15.7,0.7 16.3,0.7 16.9,0.7 17.5,0.7 18.1,0.7 18.7,0.7 19.3,0.7 19.9,0.7 20.5,0.7 21.1,0.7 21.7,0.7 22.3,0.7 44,0.7 44.6,0.7 45.2,0.7 45.8,0.7 46.4,0.7 47,0.7 47.6,0.7 48.2,0.7 48.8,0.7 49.4,0.7 10,1.2 10.6,1.2 11.2,1.2 11.8,1.2 12.4,1.2 13,1.2 13.6,1.2 14.2,1.2 14.8,1.2 15.4,1.2 16,1.2 16.6,1.2 17.2,1.2 17.8,1.2 18.4,1.2 19,1.2 19.6,1.2 20.2,1.2 20.8,1.2 21.4,1.2 22,1.2 43.7,1.2 44.3,1.2 44.9,1.2 45.5,1.2 46.1,1.2 46.7,1.2 47.3,1.2 47.9,1.2 48.5,1.2 49.1,1.2 10.3,1.7 10.9,1.7 11.5,1.7 12.1,1.7 12.7,1.7 13.3,1.7 13.9,1.7 14.5,1.7 15.1,1.7 15.7,1.7 16.3,1.7 16.9,1.7 17.5,1.7 18.1,1.7 18.7,1.7 19.3,1.7 19.9,1.7 20.5,1.7 21.1,1.7 21.7,1.7 22.3,1.7 44,1.7 44.6,1.7 45.2,1.7 45.8,1.7 46.4,1.7 47,1.7 47.6,1.7 48.2,1.7 48.8,1.7 49.4,1.7 10,2.2 10.6,2.2 11.2,2.2 11.8,2.2 12.4,2.2 13,2.2 13.6,2.2 14.2,2.2 14.8,2.2 15.4,2.2 16,2.2 16.6,2.2 17.2,2.2 17.8,2.2 18.4,2.2 19,2.2 19.6,2.2 20.2,2.2 20.8,2.2 21.4,2.2 22,2.2 43.7,2.2 44.3,2.2 44.9,2.2 45.5,2.2 46.1,2.2 46.7,2.2 47.3,2.2 47.9,2.2 48.5,2.2 49.1,2.2 10.3,2.7 10.9,2.7 11.5,2.7 12.1,2.7 12.7,2.7 13.3,2.7 13.9,2.7 14.5,2.7 15.1,2.7 15.7,2.7 16.3,2.7 16.9,2.7 17.5,2.7 18.1,2.7 18.7,2.7 19.3,2.7 19.9,2.7 20.5,2.7 21.1,2.7 21.7,2.7 22.3,2.7 44,2.7 44.6,2.7 45.2,2.7 45.8,2.7 46.4,2.7 47,2.7 47.6,2.7 48.2,2.7 48.8,2.7 10,3.2 10.6,3.2 11.2,3.2 11.8,3.2 12.4,3.2 13,3.2 13.6,3.2 14.2,3.2 14.8,3.2 15.4,3.2 16,3.2 16.6,3.2 17.2,3.2 17.8,3.2 18.4,3.2 19,3.2 19.6,3.2 20.2,3.2 20.8,3.2 21.4,3.2 22,3.2 43.7,3.2 44.3,3.2 44.9,3.2 45.5,3.2 46.1,3.2 46.7,3.2 47.3,3.2 47.9,3.2 48.5,3.2 10.3,3.7 10.9,3.7 11.5,3.7 12.1,3.7 12.7,3.7 13.3,3.7 13.9,3.7 14.5,3.7 15.1,3.7 15.7,3.7 16.3,3.7 16.9,3.7 17.5,3.7 18.1,3.7 18.7,3.7 19.3,3.7 19.9,3.7 20.5,3.7 21.1,3.7 21.7,3.7 22.3,3.7 44,3.7 44.6,3.7 45.2,3.7 45.8,3.7 46.4,3.7 47,3.7 47.6,3.7 10,4.2 10.6,4.2 11.2,4.2 11.8,4.2 12.4,4.2 13,4.2 13.6,4.2 14.2,4.2 14.8,4.2 15.4,4.2 16,4.2 16.6,4.2 17.2,4.2 17.8,4.2 18.4,4.2 19,4.2 19.6,4.2 20.2,4.2 20.8,4.2 21.4,4.2 22,4.2 43.7,4.2 44.3,4.2 44.9,4.2 45.5,4.2 46.1,4.2 46.7,4.2 47.3,4.2 10.3,4.7 10.9,4.7 11.5,4.7 20.5,4.7 21.1,4.7 21.7,4.7 22.3,4.7 10,5.2 10.6,5.2 11.2,5.2 20.8,5.2 21.4,5.2 22,5.2 10.3,5.7 10.9,5.7 11.5,5.7 21.1,5.7 21.7,5.7 22.289,5.691 57.3,14.8 58.3,14.8 59.3,14.8 60.3,14.8 61.3,14.8 62.3,14.8 63.3,14.8 57.8,15.2 58.8,15.2 59.8,15.2 60.8,15.2 61.8,15.2 62.8,15.2 10.3,24.6 10.9,24.6 11.5,24.6 21.1,24.6 21.7,24.6 22.289,24.609 10,25.1 10.6,25.1 11.2,25.1 20.8,25.1 21.4,25.1 22,25.1 10.3,25.6 10.9,25.6 11.5,25.6 12.1,25.6 12.7,25.6 13.3,25.6 13.9,25.6 14.5,25.6 15.1,25.6 15.7,25.6 16.3,25.6 16.9,25.6 17.5,25.6 18.1,25.6 18.7,25.6 19.3,25.6 19.9,25.6 20.5,25.6 21.1,25.6 21.7,25.6 22.3,25.6 44,25.7 44.6,25.7 45.2,25.7 45.8,25.7 46.4,25.7 47,25.7 10,26.1 10.6,26.1 11.2,26.1 11.8,26.1 12.4,26.1 13,26.1 13.6,26.1 14.2,26.1 14.8,26.1 15.4,26.1 16,26.1 16.6,26.1 17.2,26.1 17.8,26.1 18.4,26.1 19,26.1 19.6,26.1 20.2,26.1 20.8,26.1 21.4,26.1 22,26.1 44.3,26.2 44.9,26.2 45.5,26.2 46.1,26.2 46.7,26.2 47.3,26.2 47.9,26.2 10.3,26.6 10.9,26.6 11.5,26.6 12.1,26.6 12.7,26.6 13.3,26.6 13.9,26.6 14.5,26.6 15.1,26.6 15.7,26.6 16.3,26.6 16.9,26.6 17.5,26.6 18.1,26.6 18.7,26.6 19.3,26.6 19.9,26.6 20.5,26.6 21.1,26.6 21.7,26.6 22.3,26.6 44,26.7 44.6,26.7 45.2,26.7 45.8,26.7 46.4,26.7 47,26.7 47.6,26.7 48.2,26.7 10,27.1 10.6,27.1 11.2,27.1 11.8,27.1 12.4,27.1 13,27.1 13.6,27.1 14.2,27.1 14.8,27.1 15.4,27.1 16,27.1 16.6,27.1 17.2,27.1 17.8,27.1 18.4,27.1 19,27.1 19.6,27.1 20.2,27.1 20.8,27.1 21.4,27.1 22,27.1 44.3,27.2 44.9,27.2 45.5,27.2 46.1,27.2 46.7,27.2 47.3,27.2 47.9,27.2 48.5,27.2 10.3,27.6 10.9,27.6 11.5,27.6 12.1,27.6 12.7,27.6 13.3,27.6 13.9,27.6 14.5,27.6 15.1,27.6 15.7,27.6 16.3,27.6 16.9,27.6 17.5,27.6 18.1,27.6 18.7,27.6 19.3,27.6 19.9,27.6 20.5,27.6 21.1,27.6 21.7,27.6 22.3,27.6 44,27.7 44.6,27.7 45.2,27.7 45.8,27.7 46.4,27.7 47,27.7 47.6,27.7 48.2,27.7 48.8,27.7 49.4,27.7 10,28.1 10.6,28.1 11.2,28.1 11.8,28.1 12.4,28.1 13,28.1 13.6,28.1 14.2,28.1 14.8,28.1 15.4,28.1 16,28.1 16.6,28.1 17.2,28.1 17.8,28.1 18.4,28.1 19,28.1 19.6,28.1 20.2,28.1 20.8,28.1 21.4,28.1 22,28.1 44.3,28.2 44.9,28.2 45.5,28.2 46.1,28.2 46.7,28.2 47.3,28.2 47.9,28.2 48.5,28.2 49.1,28.2 10.3,28.6 10.9,28.6 11.5,28.6 12.1,28.6 12.7,28.6 13.3,28.6 13.9,28.6 14.5,28.6 15.1,28.6 15.7,28.6 16.3,28.6 16.9,28.6 17.5,28.6 18.1,28.6 18.7,28.6 19.3,28.6 19.9,28.6 20.5,28.6 21.1,28.6 21.7,28.6 22.3,28.6 44,28.7 44.6,28.7 45.2,28.7 45.8,28.7 46.4,28.7 47,28.7 47.6,28.7 48.2,28.7 48.8,28.7 49.4,28.7 10,29.1 10.6,29.1 11.2,29.1 11.8,29.1 12.4,29.1 13,29.1 13.6,29.1 14.2,29.1 14.8,29.1 15.4,29.1 16,29.1 16.6,29.1 17.2,29.1 17.8,29.1 18.4,29.1 19,29.1 19.6,29.1 20.2,29.1 20.8,29.1 21.4,29.1 22,29.1 44.3,29.2 44.9,29.2 45.5,29.2 46.1,29.2 46.7,29.2 47.3,29.2 47.9,29.2 48.5,29.2 49.1,29.2 10.3,29.6 10.9,29.6 11.5,29.6 12.1,29.6 12.7,29.6 13.3,29.6 13.9,29.6 14.5,29.6 15.1,29.6 15.7,29.6 16.3,29.6 16.9,29.6 17.5,29.6 18.1,29.6 18.7,29.6 19.3,29.6 19.9,29.6 20.5,29.6 21.1,29.6 21.7,29.6 22.3,29.6 44,29.7 44.6,29.7 45.2,29.7 45.8,29.7 46.4,29.7 47,29.7 47.6,29.7 48.2,29.7 48.8,29.7 49.4,29.7
  other v2: 71.65,13.15 71.65,16.35 64.2,26.1
HIN1_1: U3_1.7 U5_1.2 | length 3.9
  Top Layer w0.127: v2(71.313,25) 71.369,25.056 71.369,27.094 U5_1.2
  Bottom Layer w0.127: U3_1.7 70.55,25.763 v2(71.313,25)
HIN1_2: U3_2.7 U5_2.2 | length 13.2
  Top Layer w0.127: v2(68.199,3.1) 68.275,3.025 U5_2.2
  Int2 w0.127: v2(68.199,3.1) 67.7,3.599 67.7,9.2 68.93,10.43 69.23,10.43 v2(69.3,10.5)
  Bottom Layer w0.127: v2(69.3,10.5) 69.4,10.5 70.322,9.578 70.322,8.663 70.568,8.417 U3_2.7
HIN1_M_1: U1_1.2 U5_1.4 | length 9
  Top Layer w0.127: U5_1.4 70.128,27.147 70.128,24.918 v2(70.131,24.915)
  Int1 w0.127: v2(66.535,28.235) 66.535,25.965 66.99,25.509 69.545,25.509 70.131,24.924 v2(70.131,24.915)
  Bottom Layer w0.127: v2(66.535,28.235) U1_1.2
HIN1_M_2: U1_3.2 U5_2.4 | length 11.5
  Top Layer w0.127: U5_2.4 69.588,1.738 69.588,0.813 v2(69.6,0.8)
  Int2 w0.127: v2(66.59,8.635) 66.565,8.635 65.9,7.97 65.9,3.8 68.61,1.09 69.197,1.09 69.487,0.8 v2(69.6,0.8)
  Bottom Layer w0.127: v2(66.59,8.635) U1_3.2
HIN2_1: U3_1.3 U5_1.14 | length 4.3
  Top Layer w0.127: U5_1.14 70.787,21.037 70.787,20.024 v2(70.8,20.012)
  Bottom Layer w0.127: U3_1.3 70.05,22.15 70.8,21.4 v2(70.8,20.012)
HIN2_2: U3_2.3 U5_2.14 | length 5.5
  Top Layer w0.127: v2(68.925,6.795) U5_2.14
  Int2 w0.127: v2(68.925,6.795) 68.925,4.707 v2(70.068,3.564)
  Bottom Layer w0.127: v2(70.068,3.564) U3_2.3
HIN2_M_1: U1_2.2 U5_1.12 | length 6.2
  Top Layer w0.127: U5_1.12 69.487,21.037 69.487,20.024 v2(69.5,20.012)
  Int1 w0.127: v2(66.535,23.135) 67.065,23.135 69.492,20.708 69.492,20.02 v2(69.5,20.012)
  Bottom Layer w0.127: v2(66.535,23.135) U1_2.2
HIN2_M_2: U1_4.2 U5_2.12 | length 6.2
  Top Layer w0.127: U5_2.12 70.262,7.813 70.262,6.038 v2(70.3,6)
  Int1 w0.127: v2(67.025,3.525) 67.825,3.525 v2(70.3,6)
  Bottom Layer w0.127: v2(67.025,3.525) U1_4.2
LIN1_M_1: U1_1.3 U5_1.7 | length 3
  Top Layer w0.127: U5_1.7 68.237,27.088 68.237,26.063 v2(68.3,26)
  Bottom Layer w0.127: U1_1.3 67.525,26.965 68.3,26.19 v2(68.3,26)
LIN1_M_2: U1_3.3 U5_2.7 | length 11.2
  Int1 w0.127: v2(66.59,7.365) 70.322,7.365 v2(71.109,6.578)
  Int2 w0.127: v2(71.109,6.578) 71.109,6.509 71.1,6.5 71.1,1.2 v2(71.5,0.8)
  Bottom Layer w0.127: v2(66.59,7.365) U1_3.3
LIN2_M_1: U1_2.3 U5_1.9 | length 0.4
  Bottom Layer w0.127: U1_2.3 v2(67.435,21.865)
LIN2_M_2: U1_4.3 U5_2.9 | length 9.3
  Top Layer w0.127: U5_2.9 72.188,7.838 72.188,6.612 v2(72.2,6.6)
  Int1 w0.127: v2(66.635,2.265) 68.075,2.265 69.918,4.107 70.267,4.107 72.2,6.04 v2(72.2,6.6)
  Bottom Layer w0.127: v2(66.635,2.265) U1_4.3
MOT_A_L: C1_1.1 J2.1 J2.2 J2.3 J2.4 Q1_1.2 Q2_1.3 U1_1.6 | length 7
  Bottom Layer w0.254: J2.2 60.363,26.56 60.768,26.965 U1_1.6
  other v1: 37.8,20.7 38.4,20.7 39,20.7 39.6,20.7 40.2,20.7 40.8,20.7 41.4,20.7 42,20.7 42.6,20.7 43.2,20.7 37.5,21.2 38.1,21.2 38.7,21.2 39.3,21.2 39.9,21.2 40.5,21.2 41.1,21.2 41.7,21.2 42.3,21.2 42.9,21.2 35.4,21.7 36,21.7 36.6,21.7 37.2,21.7 37.8,21.7 38.4,21.7 39,21.7 39.6,21.7 40.2,21.7 40.8,21.7 41.4,21.7 42,21.7 42.6,21.7 43.2,21.7 35.7,22.2 36.3,22.2 36.9,22.2 37.5,22.2 38.1,22.2 38.7,22.2 39.3,22.2 39.9,22.2 40.5,22.2 41.1,22.2 41.7,22.2 42.3,22.2 42.9,22.2 35.4,22.7 36,22.7 36.6,22.7 37.2,22.7 37.8,22.7 38.4,22.7 39,22.7 39.6,22.7 40.2,22.7 40.8,22.7 41.4,22.7 42,22.7 42.6,22.7 43.2,22.7 35.7,23.2 36.3,23.2 36.9,23.2 37.5,23.2 38.1,23.2 38.7,23.2 39.3,23.2 39.9,23.2 40.5,23.2 41.1,23.2 41.7,23.2 42.3,23.2 42.9,23.2 35.4,23.7 36,23.7 36.6,23.7 37.2,23.7 37.8,23.7 38.4,23.7 39,23.7 39.6,23.7 40.2,23.7 40.8,23.7 41.4,23.7 42,23.7 42.6,23.7 43.2,23.7 35.7,24.2 36.3,24.2 36.9,24.2 37.5,24.2 38.1,24.2 38.7,24.2 39.3,24.2 39.9,24.2 40.5,24.2 41.1,24.2 41.7,24.2 42.3,24.2 42.9,24.2 35.4,24.7 36,24.7 36.6,24.7 37.2,24.7 37.8,24.7 38.4,24.7 39,24.7 39.6,24.7 40.2,24.7 40.8,24.7 41.4,24.7 42,24.7 42.6,24.7 43.2,24.7
MOT_A_R: C1_3.1 J2.13 J2.14 J2.15 J2.16 Q1_3.2 Q2_3.3 U1_3.6 | length 7.4
  Bottom Layer w0.254: J2.16 55.955,7.365 U1_3.6
  other v1: 37.8,11 38.4,11 39,11 39.6,11 40.2,11 40.8,11 41.4,11 42,11 42.6,11 43.2,11 35.7,11.5 36.3,11.5 36.9,11.5 37.5,11.5 38.1,11.5 38.7,11.5 39.3,11.5 39.9,11.5 40.5,11.5 41.1,11.5 41.7,11.5 42.3,11.5 42.9,11.5 35.4,12 36,12 36.6,12 37.2,12 37.8,12 38.4,12 39,12 39.6,12 40.2,12 40.8,12 41.4,12 42,12 42.6,12 43.2,12 35.7,12.5 36.3,12.5 36.9,12.5 37.5,12.5 38.1,12.5 38.7,12.5 39.3,12.5 39.9,12.5 40.5,12.5 41.1,12.5 41.7,12.5 42.3,12.5 42.9,12.5 35.4,13 36,13 36.6,13 37.2,13 37.8,13 38.4,13 39,13 39.6,13 40.2,13 40.8,13 41.4,13 42,13 42.6,13 43.2,13 35.7,13.5 36.3,13.5 36.9,13.5 37.5,13.5 38.1,13.5 38.7,13.5 39.3,13.5 39.9,13.5 40.5,13.5 41.1,13.5 41.7,13.5 42.3,13.5 42.9,13.5 35.4,14 36,14 36.6,14 37.2,14 37.8,14 38.4,14 39,14 39.6,14 40.2,14 40.8,14 41.4,14 42,14 42.6,14 43.2,14
MOT_B_L: C1_2.1 J2.5 J2.6 J2.7 J2.8 Q1_2.2 Q2_2.3 U1_2.6 | length 7
  Bottom Layer w0.254: J2.6 54.877,21.48 55.262,21.865 U1_2.6
  other v1: 38.1,16 38.7,16 39.3,16 39.9,16 40.5,16 41.1,16 41.7,16 42.3,16 42.9,16 35.4,16.5 36,16.5 36.6,16.5 37.2,16.5 37.8,16.5 38.4,16.5 39,16.5 39.6,16.5 40.2,16.5 40.8,16.5 41.4,16.5 42,16.5 42.6,16.5 43.2,16.5 35.7,17 36.3,17 36.9,17 37.5,17 38.1,17 38.7,17 39.3,17 39.9,17 40.5,17 41.1,17 41.7,17 42.3,17 42.9,17 35.4,17.5 36,17.5 36.6,17.5 37.2,17.5 37.8,17.5 38.4,17.5 39,17.5 39.6,17.5 40.2,17.5 40.8,17.5 41.4,17.5 42,17.5 42.6,17.5 43.2,17.5 35.7,18 36.3,18 36.9,18 37.5,18 38.1,18 38.7,18 39.3,18 39.9,18 40.5,18 41.1,18 41.7,18 42.3,18 42.9,18 35.4,18.5 36,18.5 36.6,18.5 37.2,18.5 37.8,18.5 38.4,18.5 39,18.5 39.6,18.5 40.2,18.5 40.8,18.5 41.4,18.5 42,18.5 42.6,18.5 43.2,18.5 35.7,19 36.3,19 36.9,19 37.5,19 38.1,19 38.7,19 39.3,19 39.9,19 40.5,19 41.1,19 41.7,19 42.3,19 42.9,19 35.4,19.5 36,19.5 36.6,19.5 37.2,19.5 37.8,19.5 38.4,19.5 39,19.5 39.6,19.5 40.2,19.5 40.8,19.5 41.4,19.5 42,19.5 42.6,19.5 43.2,19.5
MOT_B_R: C1_4.1 J2.17 J2.18 J2.19 J2.20 Q1_4.2 Q2_4.3 U1_4.6 | length 7.4
  Bottom Layer w0.254: J2.20 55.975,2.265 U1_4.6
  other v1: 37.8,5.7 38.4,5.7 39,5.7 39.6,5.7 40.2,5.7 40.8,5.7 41.4,5.7 42,5.7 42.6,5.7 43.2,5.7 38.1,6.2 38.7,6.2 39.3,6.2 39.9,6.2 40.5,6.2 41.1,6.2 41.7,6.2 42.3,6.2 42.9,6.2 35.4,6.7 36,6.7 36.6,6.7 37.2,6.7 37.8,6.7 38.4,6.7 39,6.7 39.6,6.7 40.2,6.7 40.8,6.7 41.4,6.7 42,6.7 42.6,6.7 43.2,6.7 35.7,7.2 36.3,7.2 36.9,7.2 37.5,7.2 38.1,7.2 38.7,7.2 39.3,7.2 39.9,7.2 40.5,7.2 41.1,7.2 41.7,7.2 42.3,7.2 42.9,7.2 35.4,7.7 36,7.7 36.6,7.7 37.2,7.7 37.8,7.7 38.4,7.7 39,7.7 39.6,7.7 40.2,7.7 40.8,7.7 41.4,7.7 42,7.7 42.6,7.7 43.2,7.7 35.7,8.2 36.3,8.2 36.9,8.2 37.5,8.2 38.1,8.2 38.7,8.2 39.3,8.2 39.9,8.2 40.5,8.2 41.1,8.2 41.7,8.2 42.3,8.2 42.9,8.2 35.4,8.7 36,8.7 36.6,8.7 37.2,8.7 37.8,8.7 38.4,8.7 39,8.7 39.6,8.7 40.2,8.7 40.8,8.7 41.4,8.7 42,8.7 42.6,8.7 43.2,8.7 35.7,9.2 36.3,9.2 36.9,9.2 37.5,9.2 38.1,9.2 38.7,9.2 39.3,9.2 39.9,9.2 40.5,9.2 41.1,9.2 41.7,9.2 42.3,9.2 42.9,9.2 35.4,9.7 36,9.7 36.6,9.7 37.2,9.7 37.8,9.7 38.4,9.7 39,9.7 39.6,9.7 40.2,9.7 40.8,9.7 41.4,9.7 42,9.7 42.6,9.7 43.2,9.7
NetC1_1_2: C1_1.2 D1_1.2 U1_1.8 | length 7
  Top Layer w0.127: C1_1.2 C1_1.2@58.2,25.2
  Top Layer w0.254: C1_1.2@58.2,25.2 58.2,28.8 58.9,29.5 D1_1.2 v2(61.3,29.5)
NetC1_2_2: C1_2.2 D1_2.2 U1_2.8 | length 6.3
  Top Layer w0.254: C1_2.2 58.125,22.925 59.6,24.4 v2(61,24.4)
NetC1_3_2: C1_3.2 D1_3.2 U1_3.8 | length 2.6
  Top Layer w0.254: C1_3.2 58.225,9.9 v2(60.7,9.9)
NetC1_4_2: C1_4.2 D1_4.2 U1_4.8 | length 3.2
  Top Layer w0.254: C1_4.2 61.025,5 D1_4.2@61.225,4.8
  other v2: 61.5,4.8
NetD1_1_1: D1_1.1 R3_1.2 | length 1.7
  Top Layer w0.254: D1_1.1 R3_1.2
NetD1_2_1: D1_2.1 R3_2.2 | length 1.7
  Top Layer w0.254: D1_2.1 R3_2.2
NetD1_3_1: D1_3.1 R3_3.2 | length 2.3
  Top Layer w0.254: D1_3.1 R3_3.2
NetD1_4_1: D1_4.1 R3_4.2 | length 1.5
  Top Layer w0.254: D1_4.1 R3_4.2
NetQ1_1_1: Q1_1.1 R1_1.2 | length 27.2
  Int1 w0.127: v2(36.1,20.6) 36.5,20.2 43.7,20.2 51.7,28.2 v2(59.8,28.2)
  Bottom Layer w0.127: Q1_1.1 v2(36.1,20.6)
NetQ1_2_1: Q1_2.1 R1_2.2 | length 27.2
  Int1 w0.127: v2(36.043,15.657) 36.3,15.4 43.9,15.4 48.7,20.2 57,20.2 v2(59.9,23.1)
NetQ1_3_1: Q1_3.1 R1_3.2 | length 25.2
  Int1 w0.127: v2(36.1,10.6) 36.4,10.3 44,10.3 45,11.3 47.9,11.3 49.2,10 58.2,10 v2(59.6,8.6)
  Bottom Layer w0.127: Q1_3.1 v2(36.1,10.6)
NetQ1_4_1: Q1_4.1 R1_4.2 | length 25.4
  Int1 w0.127: v2(36.1,5.3) 36.211,5.3 36.411,5.1 43.9,5.1 44.9,6.1 48,6.1 49.1,5 58.1,5 v2(59.6,3.5)
  Bottom Layer w0.127: v2(36.1,5.3) Q1_4.1
NetQ2_1_1: Q2_1.1 R2_1.2 | length 16.6
  Int1 w0.127: v2(45.3,20.6) 50,25.3 59.4,25.3 v2(59.8,25.7)
  Bottom Layer w0.127: Q2_1.1 v2(45.3,20.6)
NetQ2_2_1: Q2_2.1 R2_2.2 | length 16.9
  Int1 w0.127: v2(45.3,15.9) 47.1,17.7 57,17.7 v2(59.9,20.6)
  Bottom Layer w0.127: Q2_2.1 v2(45.3,15.9)
NetQ2_3_1: Q2_3.1 R2_3.2 | length 16.3
  Int1 w0.127: v2(45.3,10.6) 48.4,7.5 58,7.5 v2(59.6,5.9)
  Bottom Layer w0.127: Q2_3.1 v2(45.3,10.6)
NetQ2_4_1: Q2_4.1 R2_4.2 | length 16.3
  Int1 w0.127: v2(45.3,5.4) 47.7,5.4 52.1,1 v2(59.6,1)
  Bottom Layer w0.127: v2(45.3,5.4) Q2_4.1
NetQ3_1_1: Q3_1.1 R4_1.2 | length 0.5
  Bottom Layer w0.127: Q3_1.1 v1(65.2,16.45)
NetQ3_2_1: Q3_2.1 R4_2.2 | length 0.5
  Bottom Layer w0.127: Q3_2.1 v1(65.2,13.25)
NetR1_1_1: R1_1.1 U1_1.7 | length 0.3
  Bottom Layer w0.127: U1_1.7 v1(61.665,28.235)
NetR1_2_1: R1_2.1 U1_2.7 | length 0
  Bottom Layer w0.127: v1(61.375,23.125) U1_2.7
NetR1_3_1: R1_3.1 U1_3.7 | length 0.3
  Bottom Layer w0.127: U1_3.7 v1(61.665,8.635)
NetR1_4_1: R1_4.1 U1_4.7
  other v1: 61.4,3.5
NetR2_1_1: R2_1.1 U1_1.5 | length 0.3
  Bottom Layer w0.127: U1_1.5 v1(61.695,25.695)
NetR2_2_1: R2_2.1 U1_2.5 | length 0
  Bottom Layer w0.127: U1_2.5 v1(61.395,20.595)
NetR2_3_1: R2_3.1 U1_3.5 | length 0.3
  Bottom Layer w0.127: U1_3.5 v1(61.695,6.095)
NetR2_4_1: R2_4.1 U1_4.5
  other v1: 61.4,1
NetR4_1_1: R4_1.1 U4_1.4 | length 1.6
  Top Layer w0.127: R4_1.1 68.75,16.4 U4_1.4
NetR4_2_1: R4_2.1 U4_2.4 | length 1.6
  Top Layer w0.127: R4_2.1 68.75,13.2 U4_2.4
PWM_L: J3.5 U3_1.2 U3_1.6 | length 14.8
  Int2 w0.127: v2(72.5,22.6) 73.926,22.6 74.6,21.926 74.6,17.5 J3.5
  Bottom Layer w0.127: U3_1.6 70.05,25.75 70.621,25.179 70.621,24.318 70.55,24.247 U3_1.2 70.593,22.957 70.593,22.482 70.922,22.153 72.053,22.153 v2(72.5,22.6)
PWM_R: J3.6 U3_2.2 U3_2.6 | length 11.6
  Int2 w0.127: v2(69.8,9.4) 73.237,12.837 73.237,13.597 J3.6
  Bottom Layer w0.127: v2(69.8,9.4) 70.068,9.132 U3_2.6 70.068,6.926 70.79,6.203 70.79,5.452 70.561,5.223 70.561,5.095 70.564,5.091 70.564,4.33 U3_2.2
pads on no net: J3.9 J3.10 U4_1.1 U4_2.1 U5_1.8 U5_2.8 U6.4 U6.5

## Polygon pours and split planes (outlines as drawn)
GND on Bottom Layer "GND_L04_P006" (solid, remove dead copper, pour order 6): 0,30.4 75,30.4 75,0 0,0
MOT_A_R on Bottom Layer "MOT_A_R_L04_P003" (solid, remove dead copper, pour order 3): 34.5,10 34.5,15 43.5,15 43.5,10
MOT_B_L on Bottom Layer "MOT_B_L_L04_P004" (solid, remove dead copper, pour order 4): 34.5,15 34.5,20 43.5,20 43.5,15
MOT_B_R on Bottom Layer "MOT_B_R_L04_P002" (solid, remove dead copper, pour order 2): 34.5,5 34.5,10 43.5,10 43.5,5
MOT_A_L on Bottom Layer "MOT_A_L_L04_P005" (solid, remove dead copper, pour order 5): 34.5,20 34.5,25 43.5,25 43.5,20
24V on Bottom Layer "24V_L04_P001" (solid, remove dead copper, pour order 1): 27,25 34.5,25 34.5,5 27,5
24V on Top Layer "24V_L01_P010" (solid, remove dead copper, pour order 10): 0,0 9.4,0 9.4,5 35,5 35,25 9.4,25 9.4,30.4 0,30.4
MOT_A_L on Top Layer "MOT_A_L_L01_P000" (solid, remove dead copper, pour order 0): 35,25 47.5,25 50,27.5 50,30.4 56.3,30.4 56.3,22.7 50.1,22.7 47.4,20 35,20
GND on Top Layer "GND_L01_P011" (solid, remove dead copper, pour order 11): 9.4,5 47.5,5 50,2.5 50,0 9.4,0
MOT_A_R on Top Layer "MOT_A_R_L01_P009" (solid, remove dead copper, pour order 9): 35,10 47.5,10 50,7.5 56.3,7.5 56.3,12.5 50,12.5 48.2,14.3 35,14.3
24V on Top Layer "24V_L01_P013" (solid, remove dead copper, pour order 13): 34.741,14.3 34.741,15.7 48.2,15.7 50.1,17.6 56.3,17.6 56.3,12.5 50,12.5 48.2,14.3
MOT_B_L on Top Layer "MOT_B_L_L01_P007" (solid, remove dead copper, pour order 7): 35,19.8 47.2,19.8 50.1,22.7 56.3,22.7 56.3,17.6 50.1,17.6 48.2,15.7 35,15.7
3V3 on Top Layer "3V3_L01_P015" (solid, remove dead copper, pour order 15): 68,30.4 75,30.4 75,0 68,0
12V on Top Layer "12V_L01_P014" (solid, remove dead copper, pour order 14): 56.3,0 56.3,30.4 68,30.4 68,0
MOT_B_R on Top Layer "MOT_B_R_L01_P008" (solid, remove dead copper, pour order 8): 35,5 47.5,5 50,2.5 50,0 56.3,0 56.3,7.5 50,7.5 47.5,10 35,10
GND on Top Layer "GND_L01_P012" (solid, remove dead copper, pour order 12): 9.4,25 47.5,25 50,27.5 50,30.4 9.4,30.4
24V on Int1 "24V_L02_P024" (solid, remove dead copper, pour order 24): 34.9,15.4 48.3,15.4 50.2,17.3 56.3,17.3 56.3,12.8 50.1,12.8 48.3,14.6 34.9,14.6
24V on Int1 "24V_L02_P016" (solid, remove dead copper, pour order 16): 0,30.4 35,30.4 34.9,30.3 34.9,0 0,0
GND on Int2 "GND_L03_P023" (solid, remove dead copper, pour order 23): 34.9,0 50,0 50,2.5 47.5,5 34.9,5
GND on Int2 "GND_L03_P022" (solid, remove dead copper, pour order 22): 34.9,30.4 50,30.4 50,27.5 47.5,25 34.9,25
MOT_A_L on Int2 "MOT_A_L_L03_P018" (solid, remove dead copper, pour order 18): 35,19.9 47.3,19.9 50.1,22.7 56.3,22.7 56.3,30.4 50,30.4 50,27.5 47.5,25 35,25
MOT_B_L on Int2 "MOT_B_L_L03_P021" (solid, remove dead copper, pour order 21): 35,15.7 48.2,15.7 50.1,17.6 56.3,17.6 56.3,22.7 50.1,22.7 47.4,20 35,20
MOT_A_R on Int2 "MOT_A_R_L03_P020" (solid, remove dead copper, pour order 20): 35,10 47.5,10 50,7.5 56.3,7.5 56.3,12.5 50,12.5 48.2,14.3 35,14.3
MOT_B_R on Int2 "MOT_B_R_L03_P019" (solid, remove dead copper, pour order 19): 35,5 47.5,5 50,2.5 50,0 56.3,0 56.3,7.5 50,7.5 47.5,10 35,10
GND on Int2 "GND_L03_P017" (solid, remove dead copper, pour order 17): 0,30.4 34.9,30.4 34.9,0 0,0

## Other copper
Top Layer:
  region net GND: 56.6,16 56.6,14 64,14 64,16
Bottom Layer:
  region net BRK_B_L: 64,15.8 68.2,15.8 68.2,14.2 64,14.2
  region net BRK_B_R: 64,12.6 68.2,12.6 68.2,11 64,11

## Silkscreen, mask and mechanical layers (free items; w line width, h text height)
Top Solder:
  region: 35.5,9.5 35.5,6.4 36.6,6.4 37.2,5.8 37.2,5.5 44.2,5.5 44.2,9.5
  region: 35.5,13.8 35.5,11.7 36.5,11.7 37.2,11 37.2,10.8 44.2,10.8 44.2,13.8
  region: 35.5,19.3 35.5,16.7 36.4,16.7 36.9,16.2 44.2,16.2 44.2,19.3
  region: 34.3,24.5 27.3,24.5 27.3,5.5 34.3,5.5
  region: 35.5,24.5 35.5,21.7 36.7,21.7 37.2,21.2 37.2,20.5 44.2,20.5 44.2,24.5
Mechanical 1:
  the board outline again, w0.25